# Altium PCB PCB2.PcbDoc
Units mm, origin at the board's own origin, x right, y up, seen from the top; angles counter-clockwise.
Board outline 152.4 x 101.6 mm, 2 copper layers (Top Layer, Bottom Layer); 25 components, 18 nets, 66 pads, 13 vias.
Unrouted connection lines stored in the file: 11.
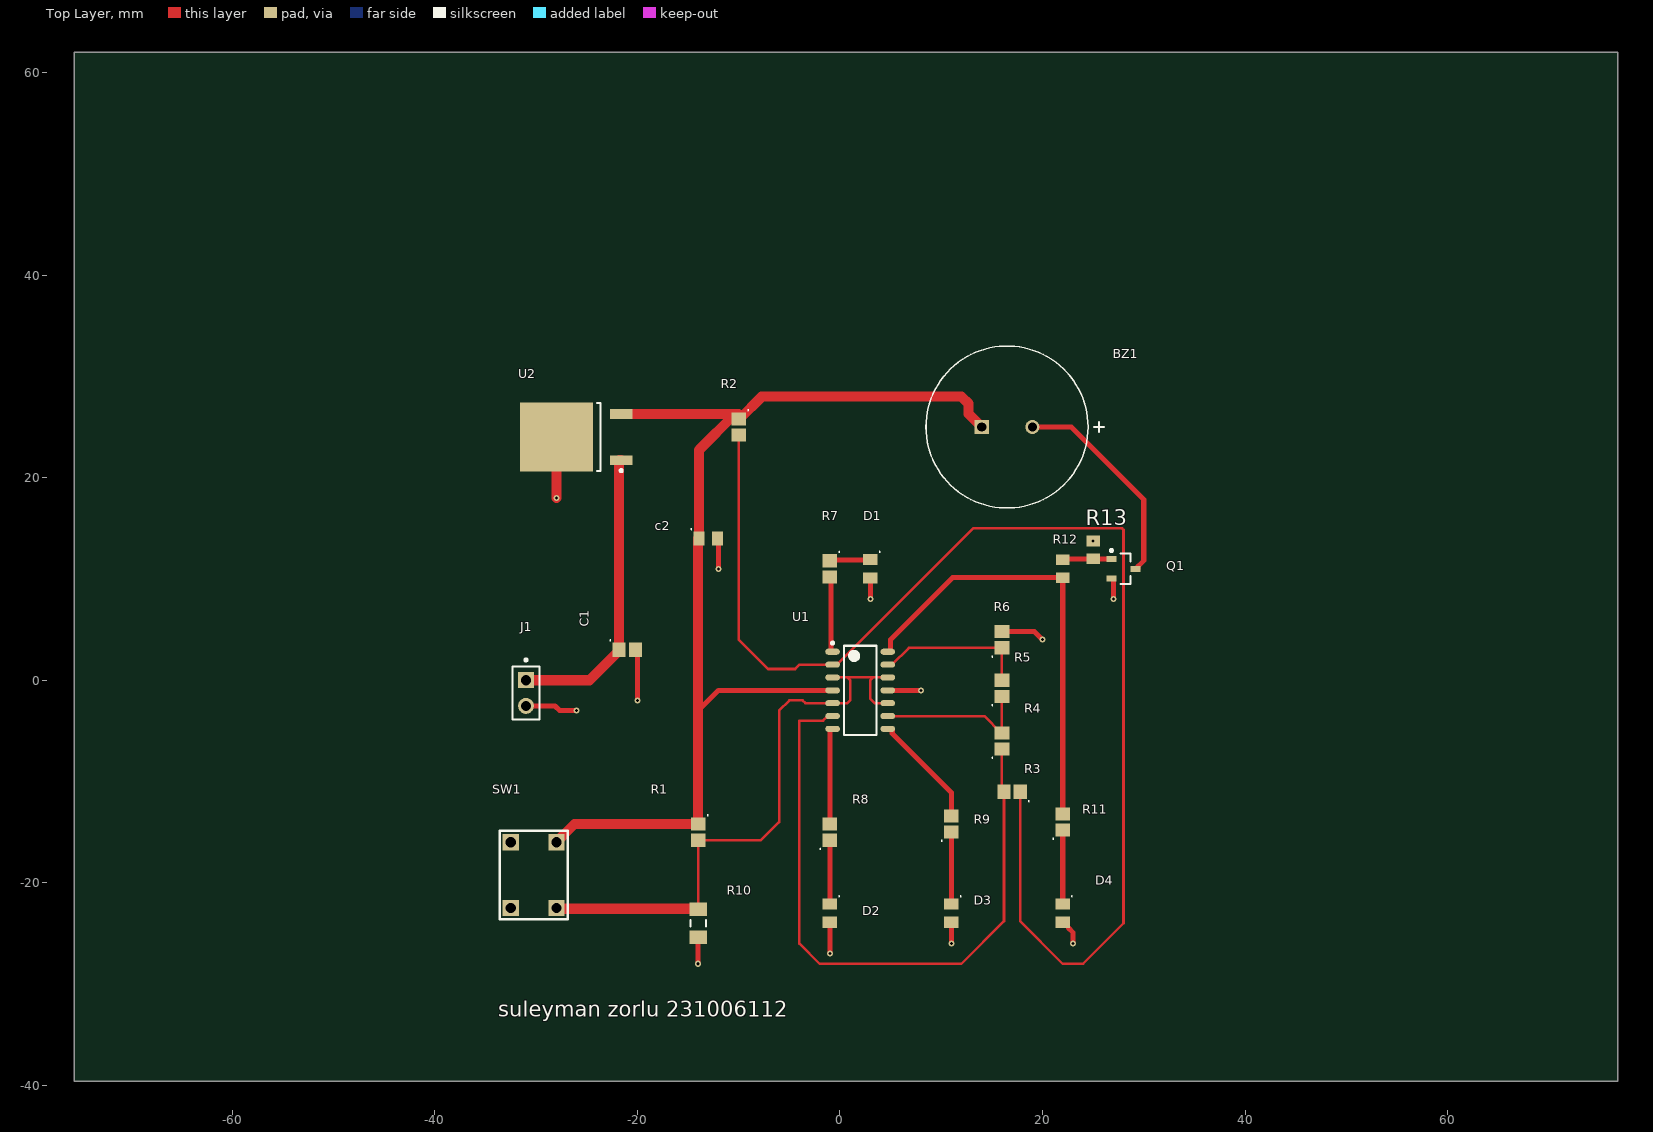
[diagram p0: Top Layer view]
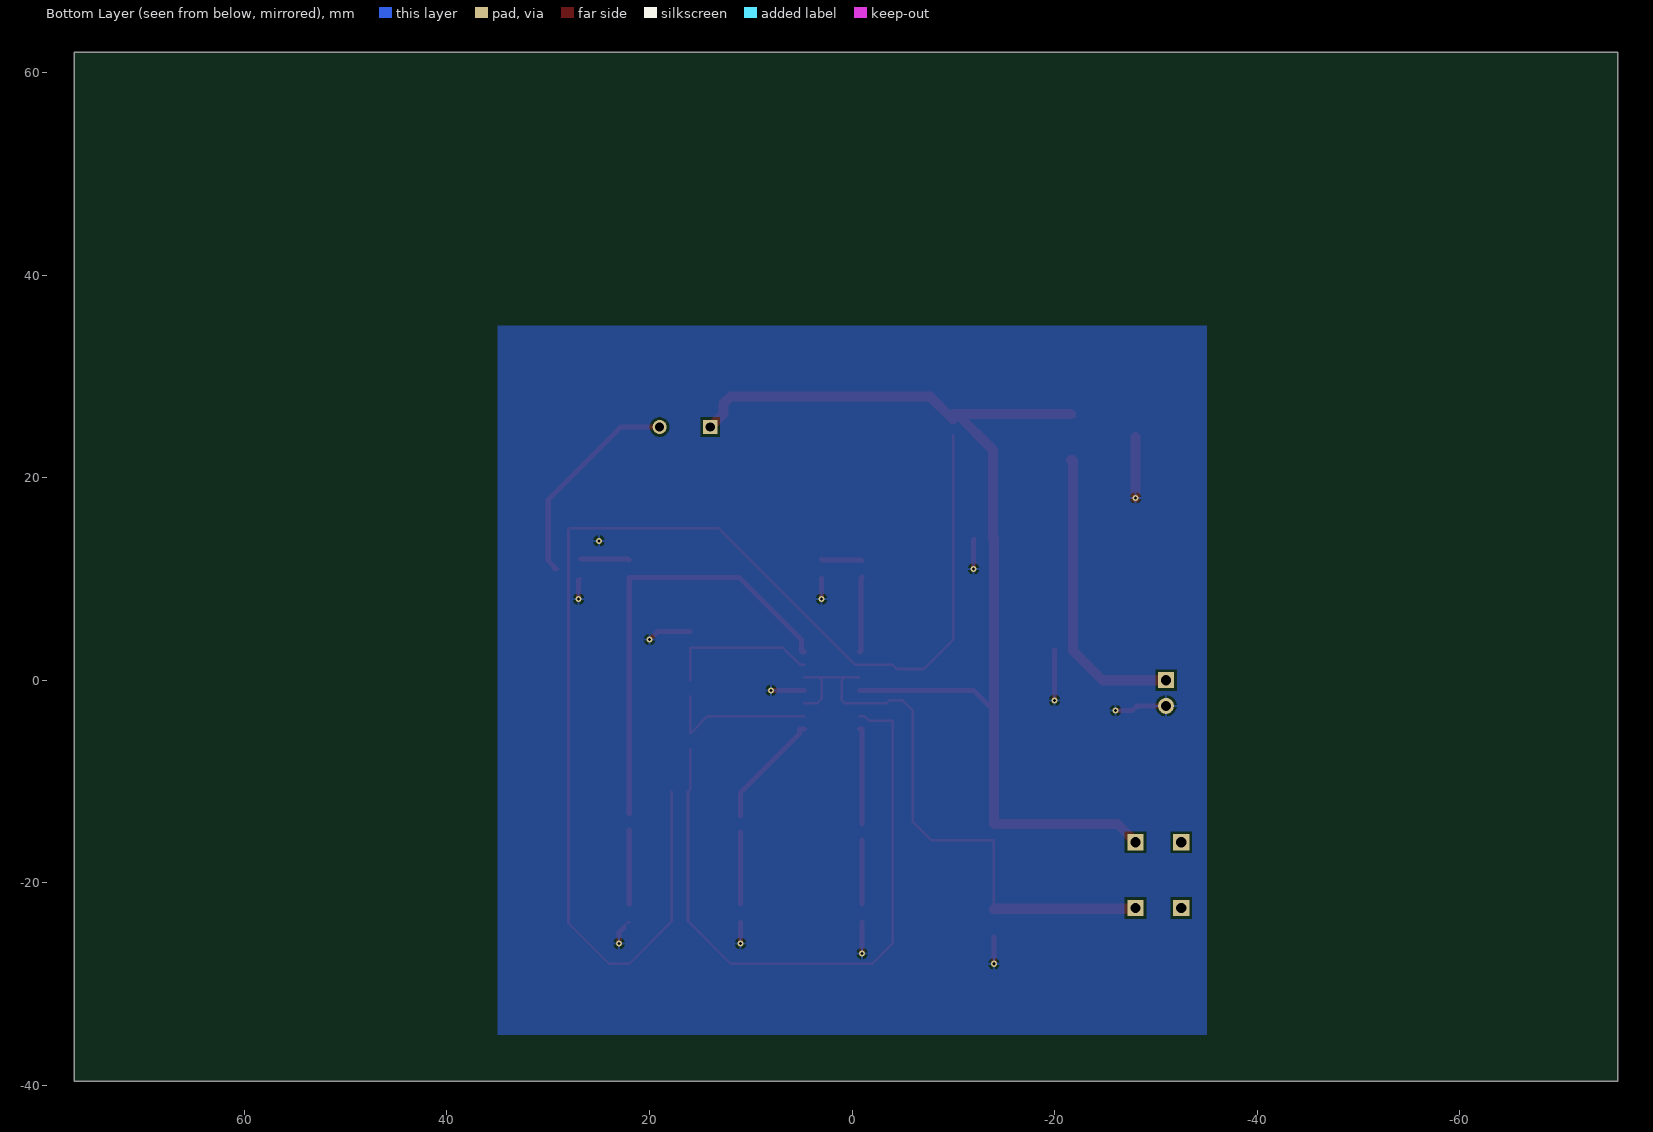
[diagram p1: Bottom Layer view, seen from below]

## Layer stack, top to bottom
Top Solder: solder mask 0.0102, Solder Resist, Dk 3.5
Top Layer: signal copper 0.0356
Dielectric 1: dielectric 0.32, FR-4, Dk 4.8
Bottom Layer: signal copper 0.0356
Bottom Solder: solder mask 0.0102, Solder Resist, Dk 3.5

## Board outline
-75.6,-39.6 76.8,-39.6 76.8,62 -75.6,62

## Design rules (kind name [scope] priority, off if disabled: settings)
Clearance [All] p1: gap=0.254 ignorepadtopadclearanceinfootprint=FALSE
PolygonConnect [All] p1: connectstyle=Relief reliefconductorwidth=0.254 reliefentries=4 polygonreliefangle="90 Angle" airgapwidth=0.254
RoutingVias [All] p1: holewidth=0.711 width=1.27 viastyle="Through Hole" minholewidth=0.711 minwidth=1.27 maxholewidth=0.711 maxwidth=1.27
SilkToSolderMaskClearance [IsPad] p1 off: minsilkscreentomaskgap=0.254 clearancetoexposedcopper=TRUE
SolderMaskExpansion [All] p1: expansion=0 istentingtop=FALSE
SupplyNets "Schematic Supply Nets_2" [InNet('+5')] p1: voltage=0.000
SupplyNets "Schematic Supply Nets_1" [InNet('GND')] p2: voltage=0.000
SupplyNets "Schematic Supply Nets" [InNet('VCC')] p3: voltage=0.000
Width Width_1 [All] p1: maxlimit=2 minlimit=0.254 preferedwidth=0.5 bottomlayer_maxwidth=0.254 bottomlayer_prefwidth=0.254 minimp=50.000000 maximp=50.000000 favimp=50.000000
Width güç [InNet('+5')] p2: maxlimit=1 minlimit=0.254 preferedwidth=1 toplayer_minwidth=1 bottomlayer_maxwidth=0.254 bottomlayer_prefwidth=0.254 minimp=50.000000 maximp=50.000000 favimp=50.000000
29 further rules are at their usual default settings.

## Components (designator, comment, footprint, x,y, rotation, side; value= is the part's Value field where it differs from the comment)
BZ1 "buzzzer" PCBComponent_1 16.697,24.918 r90 top
C1 "10uF_Cap" CAPCP2012X14N -21,3 r0 top
c2 "10uF_Cap" DIOC2012X06N -13,14 r0 top
D1 "led" DIOC2012X06 3,11 r270 top
D2 "led" DIOC2012X06N -1,-23 r270 top
D3 "led" DIOC2012X06N 11,-23 r270 top
D4 "led" DIOC2012X06N 22,-23 r270 top
J1 "TSW-102-12-T-S" FP-TSW-102-12-T-S-MFG -31,-1.27 r270 top
Q1 "mosfet" SOT95P245X110-3N 28,11 r0 top
R1 "10k" CAPCP2012X14N -14,-15 r270 top
R2 "10k" CAPCP2012X14N -10,25 r270 top
R3 "10k" CAPCP2012X14N 17,-11 r180 top
R4 "10K" CAPCP2012X14N 16,-6 r90 top
R5 "10K" CAPCP2012X14N 16,-0.8 r90 top
R6 "10K" CAPCP2012X14N 16,4 r90 top
R7 "220R" CAPCP2012X14N -1,11 r270 top
R8 "220R" CAPCP2012X14N -1,-15 r90 top
R9 "220R" CAPCP2012X14N 11,-14.2 r90 top
R10 "NTC" NTC -14,-24 r270 top
R11 "220R" CAPCP2012X14N 22,-14 r90 top
R12 "220R" RESC2012X06N 22,11 r270 top
R13 "10k" RESC2012X06N 25,12.875 r90 top
SW1 "swich" "PCBComponent_1 - duplicate4" -28,-16 r270 top
U1 "lm324" SOIC127P600X175-14N 2,-1 r0 top
U2 "7805" DPAK228P990X238-3N -26.05,24 r180 top

## Footprints (in the part's own frame and the unit in brackets; to place one, negate y for a bottom-side part, rotate by r counter-clockwise, add the part's x,y. Pads: shape width x height; smd on the part's side, far side on the other; paste and mask are expansions set on the pad)
CAPCP2012X14N [mm] "Chip Capacitor, 2-Leads, Body 2,00x1,25mm, IPC Medium Density"
  rect 1.3x1.45 smd: 1(-0.8,0) 2(0.8,0)
  silkscreen extent -1.71,0.89 -1.61,0.99, body extent -1.1,-0.7 1.1,0.7, height 1.45
DIOC2012X06 [mm] "Chip Diode, 2-Leads, Body 2,00x1,25mm, IPC Medium Density"
  rect 1.1x1.4 smd: 1(-0.9,0) 2(0.9,0)
  silkscreen extent -1.71,0.86 -1.61,0.96, body extent -1.05,-0.67 1.05,0.67, height 0.6
DIOC2012X06N [mm] "Chip Diode, 2-Leads, Body 2,00x1,25mm, IPC Medium Density"
  rect 1.1x1.4 smd: 1(-0.9,0) 2(0.9,0)
  silkscreen extent -1.71,0.86 -1.61,0.96, body extent -1.05,-0.67 1.05,0.67, height 0.6
DPAK228P990X238-3N [mm] "D-PAK, 3-Pads, Body 6,20x6,72mm (max), IPC Medium Density"
  rect 2.2x0.95 smd: 1(-4.45,2.28) 3(-4.45,-2.28)
  rect 7.2x6.8 smd: 2(1.95,0)
  silkscreen extent -4.57,-3.35 -2.05,3.43, body extent -2.4,-3.35 3.8,3.35, height 2.38
FP-TSW-102-12-T-S-MFG [mm]
  rect 1.57x1.57 hole 1.02 paste-2539.97 mask+0: 1(-1.27,0)
  round 1.57 hole 1.02 paste-2539.97 mask+0: 2(1.27,0)
  silkscreen extent -3.4,-1.34 2.61,1.34, body extent -2.71,-1.44 2.71,1.44, height 0.25
NTC [mm] ", 2-Leads, Body 3,20x1,60mm, IPC Medium Density"
  rect 1.35x1.75 smd: 1(-1.375,0) 2(1.375,0)
  silkscreen extent -0.3,-0.77 0.3,0.77, body extent -1.7,-0.85 1.7,0.85, height 0.8
PCBComponent_1 [mm]
  rect 1.4x1.4 hole 0.9 paste-2539.97 mask+0: 1(0.082,2.697)
  round 1.4 hole 0.9 paste-2539.97 mask+0: 2(0.082,-2.303)
  silkscreen extent -7.91,-9.38 8.08,8.2, body extent -8.02,-7.9 8.18,8.3, height 0.25
"PCBComponent_1 - duplicate4" [mm]
  rect 1.6x1.6 hole 1: 1(0,0) 2(6.5,0) 3(0,-4.5) 4(6.5,-4.5)
  silkscreen extent -1.14,-5.59 7.62,1.14
RESC2012X06N [mm] "Chip Resistor, 2-Leads, Body 2,00x1,25mm, IPC Medium Density"
  rect 1.05x1.35 smd: 1(-0.875,0) 2(0.875,0)
  body extent -1.05,-0.67 1.05,0.67, height 0.6
SOIC127P600X175-14N [mm] "SOIC, 14-Leads, Body 8,65x3,90mm, Pitch 1,27mm, IPC Medium Density"
  oval 1.45x0.6 smd: 1(-2.725,3.81) 2(-2.725,2.54) 3(-2.725,1.27) 4(-2.725,0) 5(-2.725,-1.27) 6(-2.725,-2.54) 7(-2.725,-3.81) 8(2.725,-3.81) 9(2.725,-2.54) 10(2.725,-1.27) 11(2.725,0) 12(2.725,1.27) 13(2.725,2.54) 14(2.725,3.81)
  silkscreen extent -2.85,-4.4 1.6,4.78, body extent -1.91,-4.48 2.09,4.32, height 1.75
SOT95P245X110-3N [mm] "SOT23, 3-Leads, Body 2,90x2,45mm, Pitch 0,95mm, IPC Medium Density"
  rect 1x0.6 smd: 1(-1.2,0.95) 2(-1.2,-0.95) 3(1.2,0)
  silkscreen extent -1.32,-1.5 0.7,1.92, body extent -0.7,-1.5 0.7,1.5, height 1.1

## Part data
J1: library part CMP-02766-001444-1, "CONN HEADER VERT 2POS 2.54MM", Contact Material=Bronze, Contact Plating=Tin, Gender=Male, Mount="Through Hole", Number of Contacts=2, Number of Rows=1, Packaging=Bulk, Pitch=2.54mm, Radiation Hardening=No, REACH SVHC="No SVHC", RoHS Compliant=Yes, Termination=Solder
R1 R2 R3 R4 R5 R6 R7 R8 R9 R11 R12 R13: library part RES_0805, "RES_0805"

## Via types
v1: diameter 0.6, hole 0.3, Top Layer to Bottom Layer, 13 vias

## Nets (pads, with @x,y where several pads share a name; then routed paths per layer and width w, separated by ;. In a path a pad name is that pad's centre, name@x,y a point inside that pad or via, vN(x,y) a via of type N, cw(c..) or ccw(c..) an arc to the next point about the centre after c; other vN are vias at no path point)
+5: BZ1.1 c2.1 R1.1 R2.1 SW1.1 U1.4 U2.3 | length 110.3
  Top Layer w0.254: U2.3@-22,26 -21.32,26 U2.3
  Top Layer w0.5: -14,-3 -12,-1 U1.4
  Top Layer w1: SW1.1 -26.2,-14.2 R1.1 -14,-3 -14,14 c2.1 -13.9,22.741 R2.1@-10.361,26.28 ; U2.3 R2.1@-10,26.28 ; R2.1 -9.925,25.8 -7.725,28 12,28 12.707,27.293 12.707,26.293 BZ1.1
GND: C1.2 c2.2 D1.2 D2.2 D3.2 D4.2 J1.2 Q1.2 R6.2 R10.2 R13.2 U1.11 U2.2 | length 41.7
  Top Layer w0.254: C1.2 C1.2@-20,3 ; c2.2 c2.2@-12,13.9 ; D4.2 22.15,-23.9 22.573,-24.323 22.573,-24.473 ; Q1.2 26.827,10.05 Q1.2@27,9.877
  Top Layer w0.5: J1.2 -28.132,-2.54 -27.672,-3 v1(-26,-3) ; v1(-20,-2) C1.2@-20,3 ; v1(-14,-28) R10.2 ; v1(-12,11) c2.2@-12,13.9 ; v1(-1,-27) D2.2 ; v1(3,8) D1.2 ; U1.11 v1(8,-1) ; v1(11,-26) D3.2 ; R6.2 19.2,4.8 v1(20,4) ; 22.573,-24.473 23,-24.9 v1(23,-26) ; v1(27,8) Q1.2@27,9.877
  Top Layer w1: v1(-28,18) U2.2
  other v1: 25,13.75
NetBZ1_2: BZ1.2 Q1.3 | length 21.3
  Top Layer w0.5: BZ1.2 22.85,25 30,17.85 30,16.25 30,16 30,11.8 29.45,11.25 29.45,11.05 29.4,11 Q1.3
NetD1_1: D1.1 R7.1 | length 4
  Top Layer w0.5: R7.1 -0.95,11.85 2.95,11.85 D1.1
NetD2_1: D2.1 R8.1 | length 6.3
  Top Layer w0.5: D2.1 R8.1
NetD3_1: D3.1 R9.1 | length 7.1
  Top Layer w0.5: D3.1 R9.1
NetD4_1: D4.1 R11.1 | length 7.3
  Top Layer w0.5: D4.1 R11.1
NetQ1_1: Q1.1 R12.1 R13.1 | length 4.8
  Top Layer w0.5: R12.1 22.075,11.95 Q1.1
NetR1_2: R1.2 R10.1 SW1.2 U1.3 U1.5 U1.10 U1.12 | length 60.2
  Top Layer w0.254: R10.1 R1.2 -7.8,-15.8 -6,-14 -6,-3 -5,-2 -3.682,-2 -3.412,-2.27 U1.5 0.73,-2.27 1,-2 1,0 0.73,0.27 ; U1.3 0.73,0.27 ; U1.10 3.419,-2.27 3,-1.851 3,0 3.27,0.27 ; U1.12 3.27,0.27 ; 0.73,0.27 3.27,0.27
  Top Layer w1: SW1.2 -27.938,-22.562 -14.062,-22.562 R10.1
NetR2_2: R2.2 R3.1 U1.2 | length 130.5
  Top Layer w0.254: R2.2 -10,4 -7.105,1.105 -4.425,1.105 -3.99,1.54 U1.2 -0.3,1.54 13.16,15 27.851,15 28,14.851 28,-24 24,-28 22,-28 17.8,-23.8 R3.1
NetR3_2: R3.2 R4.1 U1.6 | length 65.3
  Top Layer w0.254: U1.6 -1.193,-3.54 -1.653,-4 -4,-4 -4,-26 -2,-28 12,-28 16.2,-23.8 R3.2 16,-10.8 R4.1
NetR4_2: R4.2 R5.1 U1.9 | length 15.6
  Top Layer w0.254: U1.9 14.265,-3.54 15.925,-5.2 R4.2 R5.1
NetR5_2: R5.2 R6.1 U1.13 | length 15.2
  Top Layer w0.254: U1.13 5.15,1.54 6.81,3.2 R6.1 R5.2
NetR7_2: R7.2 U1.1 | length 7.6
  Top Layer w0.5: R7.2 -0.863,10.063 -0.863,2.856 -0.816,2.81 U1.1
NetR8_2: R8.2 U1.7 | length 9.6
  Top Layer w0.5: R8.2 -1,-4.856 -0.954,-4.81 U1.7
NetR9_2: R9.2 U1.8 | length 11.4
  Top Layer w0.5: U1.8 5.123,-4.81 5.169,-4.856 5.169,-5.254 11,-11.085 R9.2
NetR11_2: R11.2 R12.2 U1.14 | length 44.3
  Top Layer w0.5: U1.14 4.954,2.81 5,2.856 5,4 11.125,10.125 R12.2 R11.2
VCC: C1.1 J1.1 U2.1 | length 29.4
  Top Layer w1: J1.1 -24.725,0 -21.8,2.925 C1.1 -21.8,21.695 -21.775,21.72 U2.1
pads on no net: SW1.3 SW1.4

## Polygon pours and split planes (outlines as drawn)
GND on Bottom Layer "GND_L02_P007" (solid, pour order 7): -35,-35 35,-35 35,35 -35,35
GND on Bottom Layer "GND_L02_P004" (solid, pour order 4): -35,-35 35,-35 35,35 -35,35
GND on Bottom Layer "GND_L02_P003" (solid, pour order 3): -35,-35 35,-35 35,35 -35,35
GND on Bottom Layer "GND_L02_P001" (solid, pour order 1): -35,-35 35,-35 35,35 -35,35
GND on Bottom Layer "GND_L02_P000" (solid, pour order 0): -34.81,-35.343 -35,-35.153 -35,-35 35,-35 35,35 -35,35

## Silkscreen, mask and mechanical layers (free items; w line width, h text height)
Top Overlay:
  text "suleyman zorlu 231006112" at -33.746,-33.238 h1.52
Mechanical 1:
  lines w0.254: -1,35 35,35 35,-35 -35,-35 -35,35 0,35